# Altium PCB PCB1 -2Layer.PcbDoc
Units mil, origin at the board's own origin, x right, y up, seen from the top; angles counter-clockwise.
Board outline 4505.03 x 3000.03 mil, 2 copper layers (Component Side, Bottom Layer), stack 12.8 mil thick; 48 components, 53 nets, 188 pads, 11 vias.
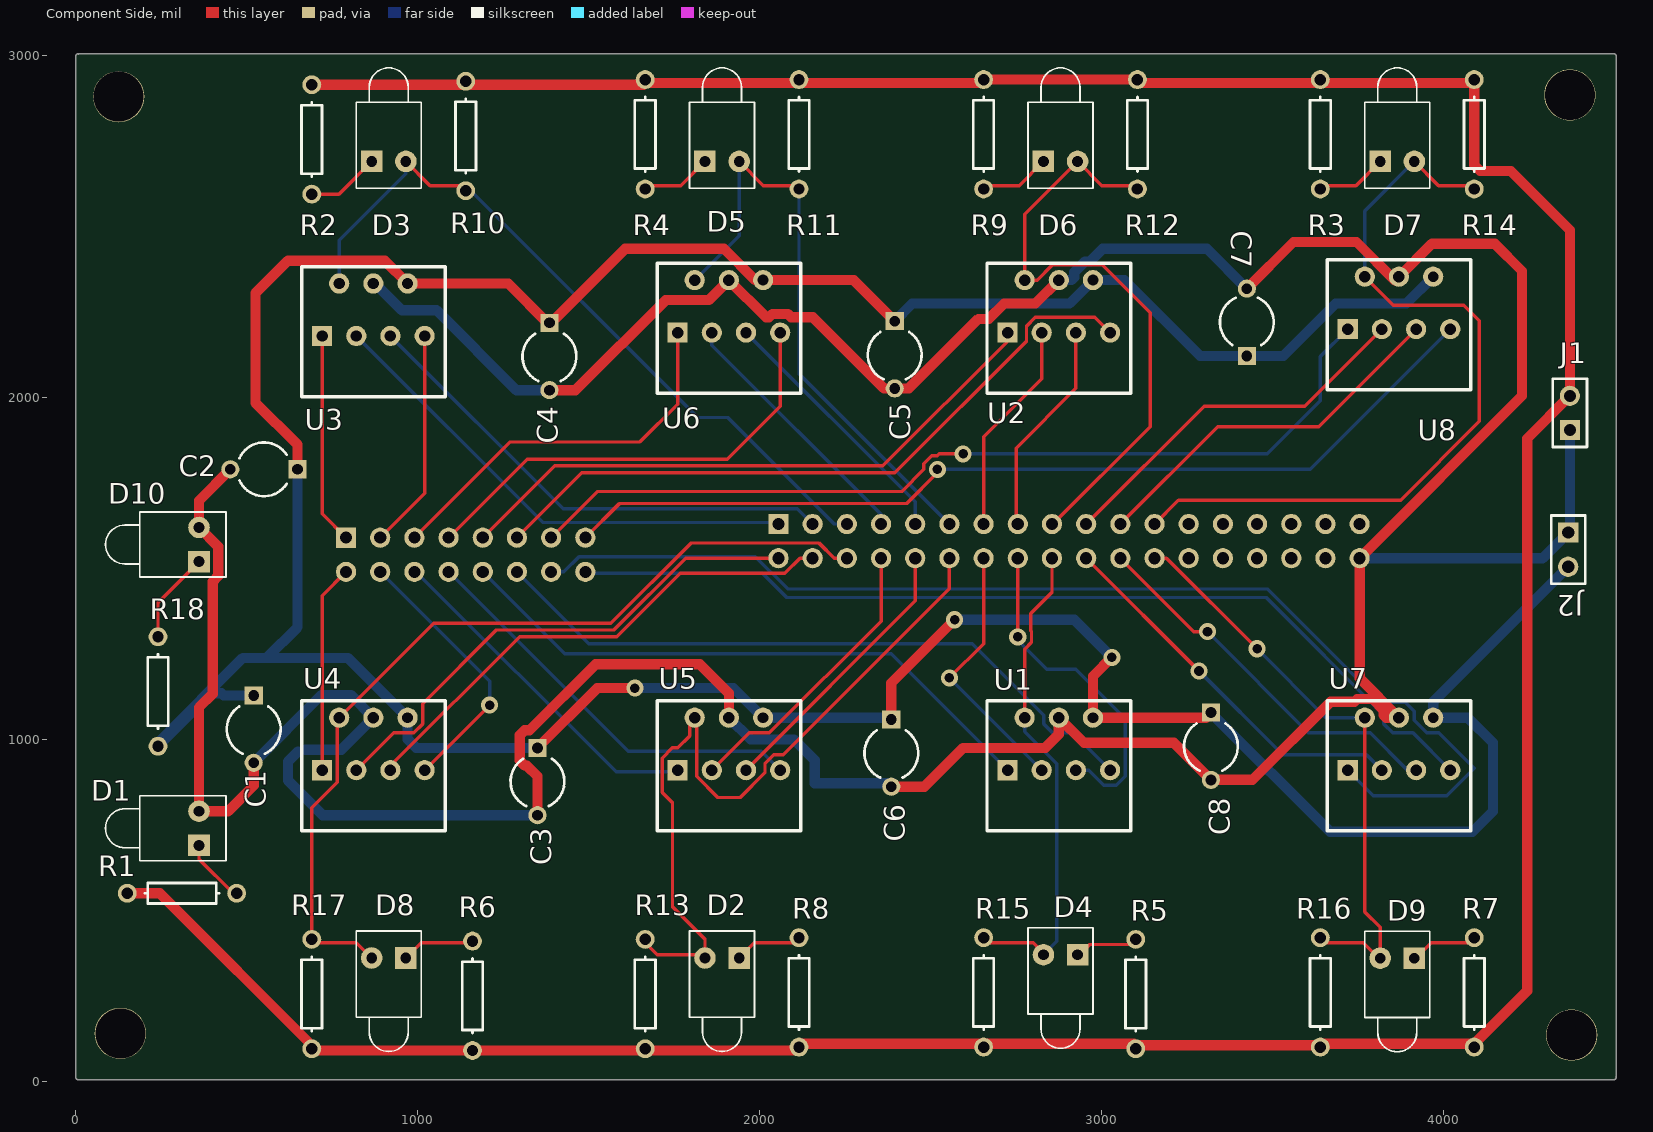
[diagram p0: Component Side view]
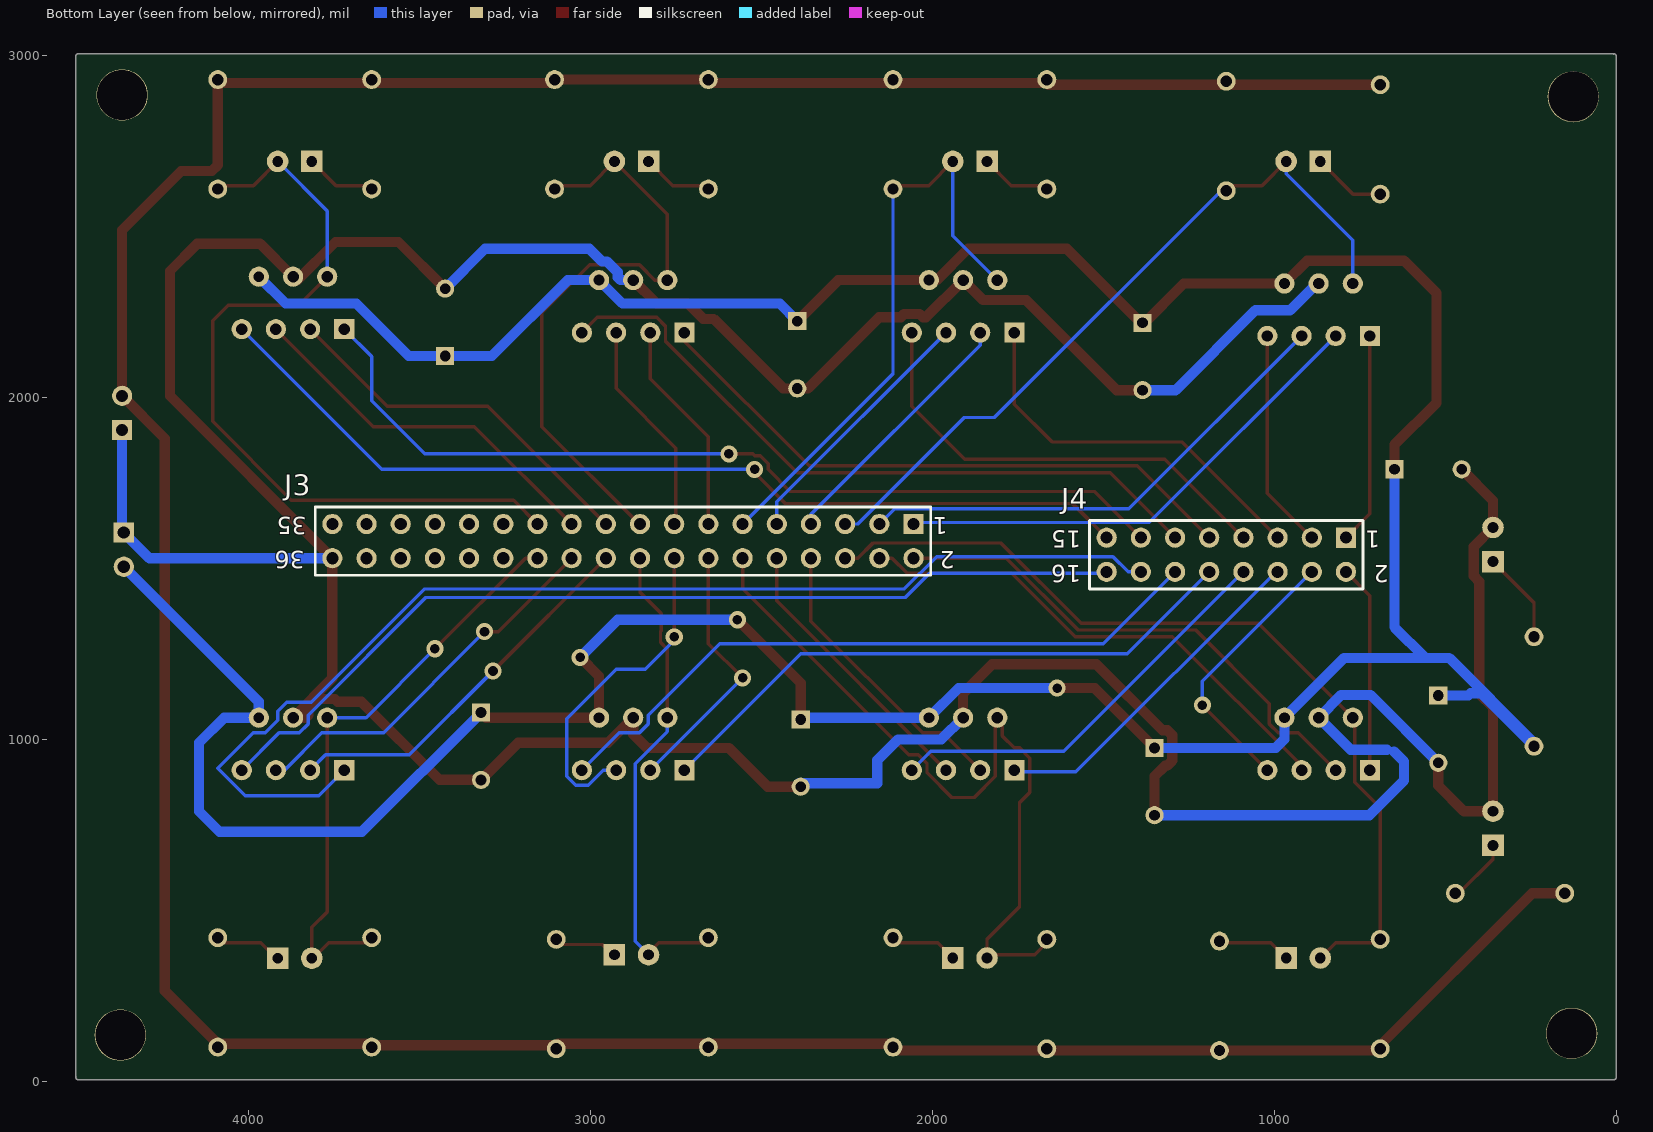
[diagram p1: Bottom Layer view, seen from below]

## Layer stack, top to bottom
Top Solder: solder mask 0.4, Solder Resist, Dk 3.5
Component Side: signal copper 1.4
Dielectric 1: core 10, FR-4, Dk 4.2
Bottom Layer: signal copper 1.4
Solder Side: solder mask 0.4, Solder Resist, Dk 3.5

## Board outline
5,4.99 cw(c5,10) -0.01,10 -0.01,3000 cw(c5,3000) 7.5,3004.35 cw(c10,3000) 10,3005.01 4500,3005.01 cw(c4500,3000) 4505.02,3000 4505.02,15 cw(c4500,15) 4504.35,12.5 cw(c4500,10) 4505.02,10 cw(c4500,10) 4500,4.99

## Design rules (kind name [scope] priority, off if disabled: settings)
Clearance [All] p1: gap=10
HoleSize [All] p1: absolutevalues=TRUE maxlimit=200 minlimit=1 maxpercent=80.000 minpercent=20.000
PolygonConnect [All] p1: connectstyle=Relief reliefconductorwidth=10 reliefentries=4 polygonreliefangle="90 Angle" airgapwidth=10
RoutingVias [All] p1: holewidth=28 width=50 viastyle="Through Hole" minholewidth=28 minwidth=50 maxholewidth=28 maxwidth=50
SolderMaskExpansion [All] p1: expansion=4
Width [All] p1: maxlimit=30 minlimit=10 preferedwidth=10 minimp=50.000000 maximp=50.000000 favimp=50.000000
29 further rules are at their usual default settings.

## Components (designator, comment, footprint, x,y, rotation, side; value= is the part's Value field where it differs from the comment)
C1 "Cap1" CAPR5-4X5 520,1030 r270 top
C2 "Cap1" CAPR5-4X5 550,1790 r180 top
C3 "Cap2" CAPR5-4X5 1350,876.57 r270 top
C4 "Cap2" CAPR5-4X5 1385,2120 r270 top
C5 "Cap2" CAPR5-4X5 2395,2125 r270 top
C6 "Cap2" CAPR5-4X5 2385,960 r270 top
C7 "Cap1" CAPR5-4X5 3425,2220 r90 top
C8 "Cap1" CAPR5-4X5 3320,980 r270 top
D1 "GREEN LED" LED-1 360,740 r180 top
D2 "RED LED" LED-1 1890,360.49 r270 top
D3 "RED LED" LED-1 915,2690.61 r90 top
D4 "RED LED" LED-1 2880,370 r270 top
D5 "RED LED" LED-1 1890,2690.61 r90 top
D6 "RED LED" LED-1 2880,2690.61 r90 top
D7 "RED LED" LED-1 3865,2690.61 r90 top
D8 "RED LED" LED-1 915,360.49 r270 top
D9 "RED LED" LED-1 3865,360 r270 top
D10 "GREEN LED" LED-1 360,1570 r180 top
J1 "3.3V PS" HDR1X2 4370,1905 r90 top
J2 "12V PS" HDR1X2 4365,1605 r270 top
J3 "Header 18X2" HDR2X18 2055,1630 r0 bottom
J4 "Header 8X2" HDR2X8 790,1590 r0 bottom
R1 "Res2" AXIAL-0.3 310,550 r180 top
R2 "Res2" AXIAL-0.3 690,2755 r90 top
R3 "Res2" AXIAL-0.3 3640,2770 r90 top
R4 "Res2" AXIAL-0.3 1665,2770 r90 top
R5 "Res2" AXIAL-0.3 3100,255 r270 top
R6 "Res2" AXIAL-0.3 1160,250 r270 top
R7 "Res2" AXIAL-0.3 4090,260 r270 top
R8 "Res2" AXIAL-0.3 2115,260 r270 top
R9 "Res2" AXIAL-0.3 2655,2770 r90 top
R10 "Res1" AXIAL-0.3 1140,2765 r90 top
R11 "Res1" AXIAL-0.3 2115,2770 r90 top
R12 "Res1" AXIAL-0.3 3105,2770 r90 top
R13 "Res1" AXIAL-0.3 1665,255 r270 top
R14 "Res1" AXIAL-0.3 4090,2770 r90 top
R15 "Res1" AXIAL-0.3 2655,260 r270 top
R16 "Res1" AXIAL-0.3 3640,260 r270 top
R17 "Res1" AXIAL-0.3 690,255 r270 top
R18 "Res3" AXIAL-0.3 240,1140 r270 top
U1 "TLE 5206-2S" "TLE 5206-2" 2665,732.83 r0 top
U2 "TLE 5206-2S" "TLE 5206-2" 2665,2012.83 r0 top
U3 "TLE 5206-2S" "TLE 5206-2" 660,2002.83 r0 top
U4 "TLE 5206-2S" "TLE 5206-2" 660,732.83 r0 top
U5 "TLE 5206-2S" "TLE 5206-2" 1700,732.83 r0 top
U6 "TLE 5206-2S" "TLE 5206-2" 1700,2012.83 r0 top
U7 "TLE 5206-2S" "TLE 5206-2" 3660,732.83 r0 top
U8 "TLE 5206-2S" "TLE 5206-2" 3660,2022.83 r0 top

## Footprints (in the part's own frame and the unit in brackets; to place one, negate y for a bottom-side part, rotate by r counter-clockwise, add the part's x,y. Pads: shape width x height; smd on the part's side, far side on the other; paste and mask are expansions set on the pad)
AXIAL-0.3 [mm] "Axial Device, Thru-Hole; 2 Leads; 0.3 in Pin Spacing"
  round 1.4 hole 0.85: 1(-4.064,0) 2(4.064,0)
  silkscreen extent -2.77,-0.76 2.77,0.76
CAPR5-4X5 [mm] "Capacitor; 2 Leads"
  rect 1.35x1.35 hole 0.8: 1(-2.5,0)
  round 1.35 hole 0.8: 2(2.5,0)
  silkscreen extent -1.69,-2 1.82,2
HDR1X2 [mm] "Connector; Header; 2 Position"
  rect 1.5x1.5 hole 0.9: 1(0,0)
  round 1.5 hole 0.9: 2(2.54,0)
  silkscreen extent -1.27,-1.27 3.81,1.27
HDR2X8 [mm] "Connector; Header; 8x2 Position"
  rect 1.5x1.5 hole 0.9: 1(0,0)
  round 1.5 hole 0.9: 2(0,2.54) 3(2.54,0) 4(2.54,2.54) 5(5.08,0) 6(5.08,2.54) 7(7.62,0) 8(7.62,2.54) 9(10.16,0) 10(10.16,2.54) 11(12.7,0) 12(12.7,2.54) 13(15.24,0) 14(15.24,2.54) 15(17.78,0) 16(17.78,2.54)
  silkscreen extent -1.27,-1.27 19.05,3.81
HDR2X18 [mm] "Connector; Header; 18x2 Position"
  rect 1.5x1.5 hole 0.9: 1(0,0)
  round 1.5 hole 0.9: 2(0,2.54) 3(2.54,0) 4(2.54,2.54) 5(5.08,0) 6(5.08,2.54) 7(7.62,0) 8(7.62,2.54) 9(10.16,0) 10(10.16,2.54) 11(12.7,0) 12(12.7,2.54) 13(15.24,0) 14(15.24,2.54) 15(17.78,0) 16(17.78,2.54) 17(20.32,0) 18(20.32,2.54) 19(22.86,0) 20(22.86,2.54) 21(25.4,0) 22(25.4,2.54) 23(27.94,0) 24(27.94,2.54) 25(30.48,0) 26(30.48,2.54) 27(33.02,0) 28(33.02,2.54) 29(35.56,0) 30(35.56,2.54) 31(38.1,0) 32(38.1,2.54) 33(40.64,0) 34(40.64,2.54) 35(43.18,0) 36(43.18,2.54)
  silkscreen extent -1.27,-1.27 44.45,3.81
LED-1 [mm] "LED; 2 Leads"
  rect 1.6x1.6 hole 0.8: 1(0,1.27)
  round 1.6 hole 0.8: 2(0,-1.27)
  silkscreen extent -2,-2.41 6.95,2.41
"TLE 5206-2" [mm] "H-bridge bent legs"
  rect 1.5x1.5 hole 0.85: 1(1.524,4.5)
  round 1.5 hole 0.85: 2(2.794,8.4) 3(4.064,4.5) 4(5.334,8.4) 5(6.604,4.5) 7(9.144,4.5)
  round 1.5 hole 0.8: 6(7.874,8.4)
  silkscreen extent 0,0 10.67,9.65

## Part data
C1 C2 C7 C8: library part Cap2, "Capacitor"
C3 C4 C5 C6: "Capacitor"
D1 D2 D3 D4 D5 D6 D7 D8 D9 D10: library part LED1, "Typical RED GaAs LED"
J1 J2: library part "Header 2", "Header, 2-Pin"
J3: "Header, 18-Pin, Dual row"
J4: "Header, 8-Pin, Dual row"
R1 R2 R3 R4 R5 R6 R7 R8 R9 R18: library part Res1, "Resistor"
R10 R11 R12 R13 R14 R15 R16 R17: "Resistor"
U1 U2 U3 U4 U5 U6 U7 U8: "Infineon TLE 5206-2S Hbridge"

## Free pads (board coordinates)
  round 150 hole 146: 2(125,2880) 3(130,140) 4(4375,135) 5(4370,2885)

## Via types
v1: diameter 50, hole 28, Component Side to Bottom Layer, 11 vias

## Nets (pads, with @x,y where several pads share a name; then routed paths per layer and width w, separated by ;. In a path a pad name is that pad's centre, name@x,y a point inside that pad or via, vN(x,y) a via of type N, cw(c..) or ccw(c..) an arc to the next point about the centre after c; other vN are vias at no path point)
GND: C1.2 C2.2 C3.2 C4.2 C5.2 C6.2 C7.2 C8.2 D1.2 D10.2 J1.1 J2.1 J3.36 U1.4 U2.4 U3.4 U4.4 U5.4 U6.4 U7.4 U8.4 | length 13056.2
  Component Side w10: 1461.57,2021.57 1462.5,2022.5
  Component Side w30: C2.2 360,1698.43 D10.2 416.5,1563.5 416.5,1478.15 400,1461.65 400,1133.43 360,1093.43 D1.2 445,790 520,865 C1.2 ; C3.2 1350,891.85 1318.43,923.43 1313.07,923.43 1298.43,938.07 1298.43,1011.93 1313.07,1026.57 1326.57,1026.57 1520,1220 1825,1220 1910,1135 U5.4 ; C4.2 1461.57,2021.57 ; 1462.5,2022.5 1725,2285 1851.46,2285 U6.4 2019.02,2234.53 2027.41,2234.53 2037.41,2244.53 2082.59,2244.53 2092.59,2234.53 2155.47,2234.53 2363.43,2026.57 C5.2 2436.57,2026.57 2639.88,2229.88 2670.47,2229.88 2715.59,2275 2806.46,2275 U2.4 ; C6.2 2481.57,861.57 2595,975 2835,975 2875,1015 U1.4 2948.54,990 3211.57,990 C8.2 3441.57,881.57 3670,1110 3739.34,1110 3747.41,1118.07 3792.59,1118.07 3824.53,1086.13 3824.53,1071.99 3832.97,1063.54 U7.4 3755,1178.54 J3.36 4230,2005 4230,2370 4150,2450 3966.46,2450 U8.4 U8.4@3861.56,2361.99 ; C7.2 3561.57,2455 3745.66,2455 U8.4@3858.56,2342.1
  Bottom Layer w10: 649.87,964.87 664.87,964.87 670,970
  Bottom Layer w30: C1.2 718.42,1130 803.54,1130 U4.4 776.46,970 670,970 ; 649.87,964.87 620,935 620,880 721.85,778.15 C3.2 ; U3.4@870,2338.54 953.54,2255 1055,2255 1288.43,2021.57 C4.2 ; U5.4 1973.54,1000 2100,1000 2161.4,938.6 2161.4,871.57 C6.2@2390,871.57 ; U2.4 2912.03,2343.54 2920.47,2351.99 2920.47,2366.13 2952.41,2398.07 2966.56,2398.07 3003.49,2435 3308.43,2435 C7.2 ; J3.36 4290,1530 J2.1 4370,1610 J1.1
H1_EF: D3.2 J3.5 R10.1 U3.2 | length 2167.2
  Component Side w10: D3.2 1035.61,2620 R10.1@1140,2620
  Bottom Layer w10: U3.2 770,2460 965,2655 D3.2 ; R10.1@1140,2620 1818.43,1941.57 1906.4,1941.57 2217.97,1630 J3.5
H1_IN1: J3.1 U3.3 | length 1465.5
  Bottom Layer w10: U3.3 1365.47,1634.53 2055,1634.53 J3.1
H1_IN2: J3.3 U3.5 | length 1462.8
  Bottom Layer w10: U3.5 1425.47,1674.53 2110.47,1674.53 J3.3
H1_OUT1: J4.1 U3.1 | length 619
  Component Side w10: U3.1 720,1660 J4.1
H1_OUT2: J4.3 U3.7 | length 643.8
  Component Side w10: J4.3 1020,1720 U3.7
H2_EF: D5.2 J3.11 R11.1 U6.2 | length 1798
  Component Side w10: D5.2@1940,2670 D5.2 2010.61,2620 R11.1@2115,2620
  Bottom Layer w10: U6.2 1940,2473.54 D5.2 ; R11.1@2115,2620 R11.1 2115,2070 J3.11
H2_IN1: J3.7 U6.3 | length 765
  Bottom Layer w10: U6.3 1860,2152.79 2355,1657.79 J3.7
H2_IN2: J3.9 U6.5 | length 765
  Bottom Layer w10: U6.5 2455,1695 J3.9
H2_OUT1: J4.5 U6.1 | length 1141.5
  Component Side w10: J4.5 1270,1870 1650,1870 1760,1980 U6.1
H2_OUT2: J4.7 U6.7 | length 1344.5
  Component Side w10: J4.7 1320,1820 1905,1820 2060,1975 U6.7
H3_EF: D6.2 J3.17 R12.1 U2.2 | length 1797.4
  Component Side w10: J3.17 2857.79,1630 3141.93,1914.14 3141.93,2248.07 3001.93,2388.07 2856.56,2388.07 2812.03,2343.54 U2.2 2775,2535.61 D6.2 3000.61,2620 R12.1@3105,2620
H3_IN1: J3.13 U2.3 | length 630.4
  Component Side w10: J3.13 2655,1885 2825,2055 U2.3
H3_IN2: J3.15 U2.5 | length 637.5
  Component Side w10: J3.15 2750,1630 2750,1852.22 2925,2027.22 U2.5
H3_OUT1: J4.9 U2.1 | length 1798.2
  Component Side w10: J4.9 1400,1800 2360,1800 2725,2165 U2.1
H3_OUT2: J4.11 U2.7 | length 2045.7
  Component Side w10: J4.11 1480,1780 2395.27,1780 2780.47,2165.2 2780.47,2208.44 2806.56,2234.53 2980.47,2234.53 U2.7
H4_EF: D7.2 J3.23 R14.1 U8.2 | length 2374.5
  Component Side w10: J3.23 3225,1700 3875,1700 4105,1930 4105,2225 4060,2270 3853.54,2270 U8.2 ; D7.2@3915,2675 D7.2 3985.61,2620 R14.1@4090,2620
  Bottom Layer w10: U8.2 3770,2545.61 D7.2
H4_IN1: J3.19 U8.3 | length 1101.1
  Component Side w10: J3.19 3300,1975 3595,1975 U8.3
H4_IN2: J3.21 U8.5 | length 1101.1
  Component Side w10: J3.21 3340,1915 3635,1915 U8.5
H4_OUT1: J4.13 U8.1 | length 2668.5
  Component Side w10: J4.13 1525,1725 2415,1725 2480,1790 2480,1806.57 2503.43,1830 2520,1830 2525,1835 v1(2595,1835)
  Bottom Layer w10: v1(2595,1835) 3485,1835 3640,1990 3640,2120 U8.1
H4_OUT2: J4.15 U8.7 | length 2788.5
  Component Side w10: J4.15 1590,1690 2430,1690 2520,1780 v1(2520,1790)
  Bottom Layer w10: v1(2520,1790) 3610,1790 U8.7
H5_EF: D8.2 J3.6 R17.1 U4.2 | length 2600.2
  Component Side w10: D8.2 820.49,405 690,405 R17.1 690,799.73 764.53,874.26 764.53,1058.07 1046.46,1340 1565,1340 1799.53,1574.53 2173.44,1574.53 2217.97,1530 J3.6
H5_IN1: J3.2 U4.3 | length 1526.6
  Component Side w10: U4.3 929.02,1019.02 988.44,1019.02 1014.53,1045.1 1014.53,1104.53 1230,1320 1573.28,1320 1783.28,1530 J3.2
H5_IN2: J3.4 U4.5 | length 1499
  Component Side w10: U4.5 920,922.29 1297.71,1300 1581.57,1300 1767.04,1485.47 2073.44,1485.47 2117.97,1530 J3.4
H5_OUT1: J4.2 U4.1 | length 609
  Component Side w10: U4.1 720,1420 J4.2
H5_OUT2: J4.4 U4.7 | length 791.2
  Component Side w10: U4.7 v1(1210,1100)
  Bottom Layer w10: J4.4 1210,1170 v1(1210,1100)
H6_EF: D2.2 J3.12 R13.1 U5.2 | length 2280.3
  Component Side w10: R13.1@1665,405 1700,370 1840,370 1840,415 1745,510 1745,814.73 1715,844.73 1715,945.27 1744.73,975 1760,975 1795,1010 1795,1048.54 U5.2 1815.47,1058.07 1815.47,891.56 1877.03,830 1942.97,830 2015.47,902.5 2015.47,928.44 2041.56,954.53 2069.53,954.53 2555,1440 J3.12
H6_IN1: J3.8 U5.3 | length 859.8
  Component Side w10: U5.3 1969.02,1019.02 2028.44,1019.02 2355,1345.57 J3.8
H6_IN2: J3.10 U5.5 | length 825
  Component Side w10: U5.5 2455,1405 J3.10
H6_OUT1: J4.6 U5.1 | length 1002.3
  Bottom Layer w10: J4.6@1000,1485 1580,905 1755,905 U5.1
H6_OUT2: J4.8 U5.7 | length 1210.2
  Bottom Layer w10: J4.8 1615,965 2005,965 U5.7
H7_EF: D4.2 J3.18 R15.1 U1.2 | length 1460.1
  Component Side w10: R15.1@2655,405 2800.49,405 D4.2@2825.25,380.25 ; U1.2 2775,1263.43 2795,1283.43 2795,1316.57 2793.28,1318.28 2793.28,1368.28 2855,1430 J3.18 ; D4.2@2830,365 D4.2
  Bottom Layer w10: U1.2 2775,1022.97 2869.53,928.44 2869.53,409.53 D4.2 ; J3.18@2855,1505.47 J3.18
H7_IN1: J3.14 U1.3 | length 780.3
  Component Side w10: v1(2555,1180) 2655,1280 J3.14
  Bottom Layer w10: v1@2550,1185 v1(2555,1180) U1.3
H7_IN2: J3.16 U1.5 | length 1006.8
  Component Side w10: v1(2755,1300) J3.16
  Bottom Layer w10: v1@2755,1290 2840,1205 2925,1205 3069.53,1060.47 3069.53,891.56 3043.44,865.47 3006.56,865.47 2962.03,910 U1.5 ; J3.16@2755,1505.47 J3.16
H7_OUT1: J4.10 U1.1 | length 1775.2
  Bottom Layer w10: J4.10 1430,1250 2385,1250 U1.1
H7_OUT2: J4.12 U1.7 | length 1990.4
  Bottom Layer w10: J4.12 1500,1280 2621.52,1280 2830.47,1071.04 2830.47,1045.1 2856.56,1019.02 2915.98,1019.02 U1.7
H8_EF: D9.2 J3.24 R16.1 U7.2 | length 1731.1
  Component Side w10: J3.24 3190,1530 v1(3455,1265) ; R16.1@3640,405 3765,405 3815,355 D9.2 3815,450 3770,495 U7.2
  Bottom Layer w10: v1(3455,1265) 3656.46,1063.54 U7.2
H8_IN1: J3.20 U7.3 | length 1126.8
  Component Side w10: J3.20 v1(3285,1200) v1@3290,1200
  Bottom Layer w10: v1(3285,1200) 3530,955 3775,955 U7.3
H8_IN2: J3.22 U7.5 | length 1114.7
  Component Side w10: J3.22 3270,1315 v1(3310,1315)
  Bottom Layer w10: v1@3315,1310 3605,1020 3750.57,1020 3751.56,1019.02 3785.98,1019.02 3895,910 U7.5
H8_OUT1: J4.14 U7.1 | length 3424.5
  Bottom Layer w10: J4.14 1427.03,1490 1471.56,1534.53 1987.5,1534.53 2082.03,1440 3484.8,1440 3816.73,1108.07 3888.44,1108.07 3914.53,1081.99 3914.53,1056.04 3951.56,1019.02 3985.98,1019.02 4090,915 4010,835 3795,835 U7.1
H8_OUT2: J4.16 U7.7 | length 2788.1
  Bottom Layer w10: J4.16 1490,1485.47 2008.27,1485.47 2078.74,1415 3481.52,1415 3825.47,1071.04 3825.47,1045.1 3851.56,1019.02 3910.98,1019.02 U7.7
NetD1_1: D1.1 R1.1 | length 181.4
  Component Side w10: D1.1 360,650 R1.1@460,550
NetD2_1: D2.1 R8.1 | length 193.4
  Component Side w10: D2.1 1984.51,405 R8.1@2115,405
NetD3_1: D3.1 R2.1 | length 214.6
  Component Side w10: R2.1 769.39,2595 D3.1
NetD4_1: D4.1 R5.1 | length 184.5
  Component Side w10: D4.1@2930,365 2965,400 R5.1@3100,400
NetD5_1: D5.1 R4.1 | length 204.2
  Component Side w10: R4.1@1665,2620 1769.39,2620 D5.1
NetD6_1: D6.1 R9.1 | length 204.2
  Component Side w10: R9.1@2655,2620 2759.39,2620 D6.1
NetD7_1: D7.1 R3.1 | length 204.2
  Component Side w10: R3.1@3640,2620 3744.39,2620 D7.1
NetD8_1: D8.1 R6.1 | length 193.4
  Component Side w10: D8.1 1009.51,405 R6.1@1140,405
NetD9_1: D9.1 R7.1 | length 195.7
  Component Side w10: D9.1@3915,355 3965,405 R7.1@4090,405
NetD10_1: D10.1 R18.1 | length 279.7
  Component Side w10: R18.1@240,1290 R18.1 240,1400 D10.1
"VCC 3.3V": J1.2 R1.2 R2.2 R3.2 R4.2 R5.2 R6.2 R7.2 R8.2 R9.2 R10.2 R11.2 R12.2 R13.2 R14.2 R15.2 R16.2 R17.2 | length 10638
  Component Side w30: R1.2@160,550 245,550 705,90 R6.2 2095,90 2115,110 3095,110 3100,105 3635,105 3640,110 4090,110 4245,265 4245,1880 J1.2 4370,2490 4197.44,2662.56 4107.44,2662.56 4090,2680 4090,2920 3105,2920 3095,2930 R9.2 2645,2920 1665,2920 1660,2915 R2.2
"VCC 12V": C1.1 C2.1 C3.1 C4.1 C5.1 C6.1 C7.1 C8.1 J2.2 R18.2 U1.6 U2.6 U3.6 U4.6 U5.6 U6.6 U7.6 U8.6 | length 11418.8
  Component Side w30: C2.1 648.43,1861.57 525,1985 525,2305 620,2400 903.54,2400 U3.6 1264.88,2333.54 1385,2213.43 1606.57,2435 1895.66,2435 1987.11,2343.54 U6.6 2274.88,2343.54 C5.1 ; C3.1 1525,1150 v1(1635,1150) ; C6.1 2385,1165 v1(2570,1350) ; v1(3030,1240) 2975,1185 U1.6 3305.12,1063.54 C8.1
  Bottom Layer w30: R18.2 395,1135 425,1135 431.57,1128.43 C1.1 ; R18.2@240,990 488.43,1238.43 558.43,1238.43 ; C2.1 648.43,1328.43 558.43,1238.43 ; C3.1 995.57,975 970,1000.57 U4.6 795.12,1238.43 558.43,1238.43 ; v1(1635,1150) 1923.54,1150 U5.6 2385.12,1063.54 C6.1@2390,1068.43 ; C5.1 2446.57,2275 2906.46,2275 U2.6 3066.46,2343.54 3288.43,2121.57 C7.1 3531.57,2121.57 3685,2275 3891.46,2275 U8.6 ; v1(2570,1350) 2920,1350 v1(3030,1240) ; C8.1 3668.43,730 4085,730 4145,790 4145,990 4071.46,1063.54 U7.6 3970,1110 J2.2
pads on no net: J3.25 J3.26 J3.27 J3.28 J3.29 J3.30 J3.31 J3.32 J3.33 J3.34 J3.35

## Silkscreen, mask and mechanical layers (free items; w line width, h text height)
Mechanical 1:
  lines w10: 5,3000 5,10 4500,10 ; 10,3000 4500,3000 4500,15 ; 3975,10 3980,15

## Text inside footprints (layer, text, board x,y; h text height)
J3: Bottom Overlay "36" at 3835,1550 h50 r180; Bottom Overlay "35" at 3830,1650 h50 r180; Bottom Overlay "1" at 1955,1650 h50 r180; Bottom Overlay "2" at 1935,1550 h50 r180
J4: Bottom Overlay "2" at 665,1510 h50 r180; Bottom Overlay "1" at 690,1610 h50 r180; Bottom Overlay "15" at 1565,1610 h50 r180; Bottom Overlay "16" at 1565,1510 h50 r180